# Altium PCB RGB LED.PcbDoc
Units mm, origin at the board's own origin, x right, y up, seen from the top; angles counter-clockwise.
Board outline 125.1 x 71.1 mm, 2 copper layers (Top Layer, Bottom Layer), stack 1.671 mm thick; 57 components, 88 nets, 235 pads, 104 vias.
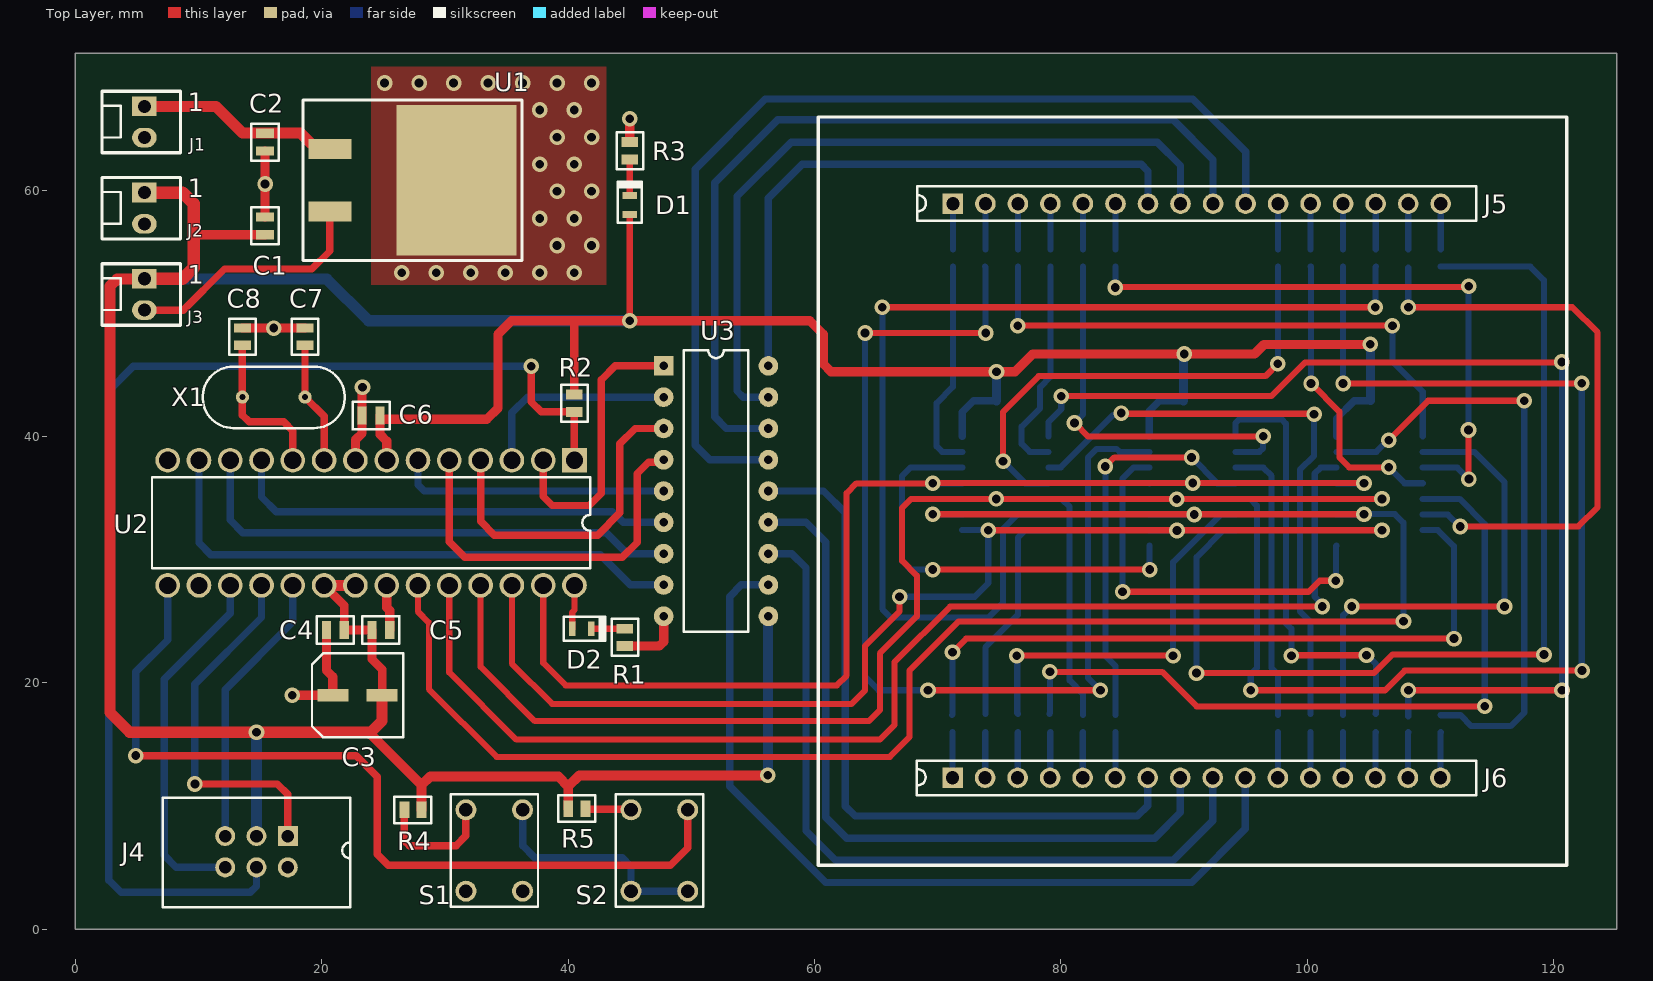
[diagram p0: Top Layer view]
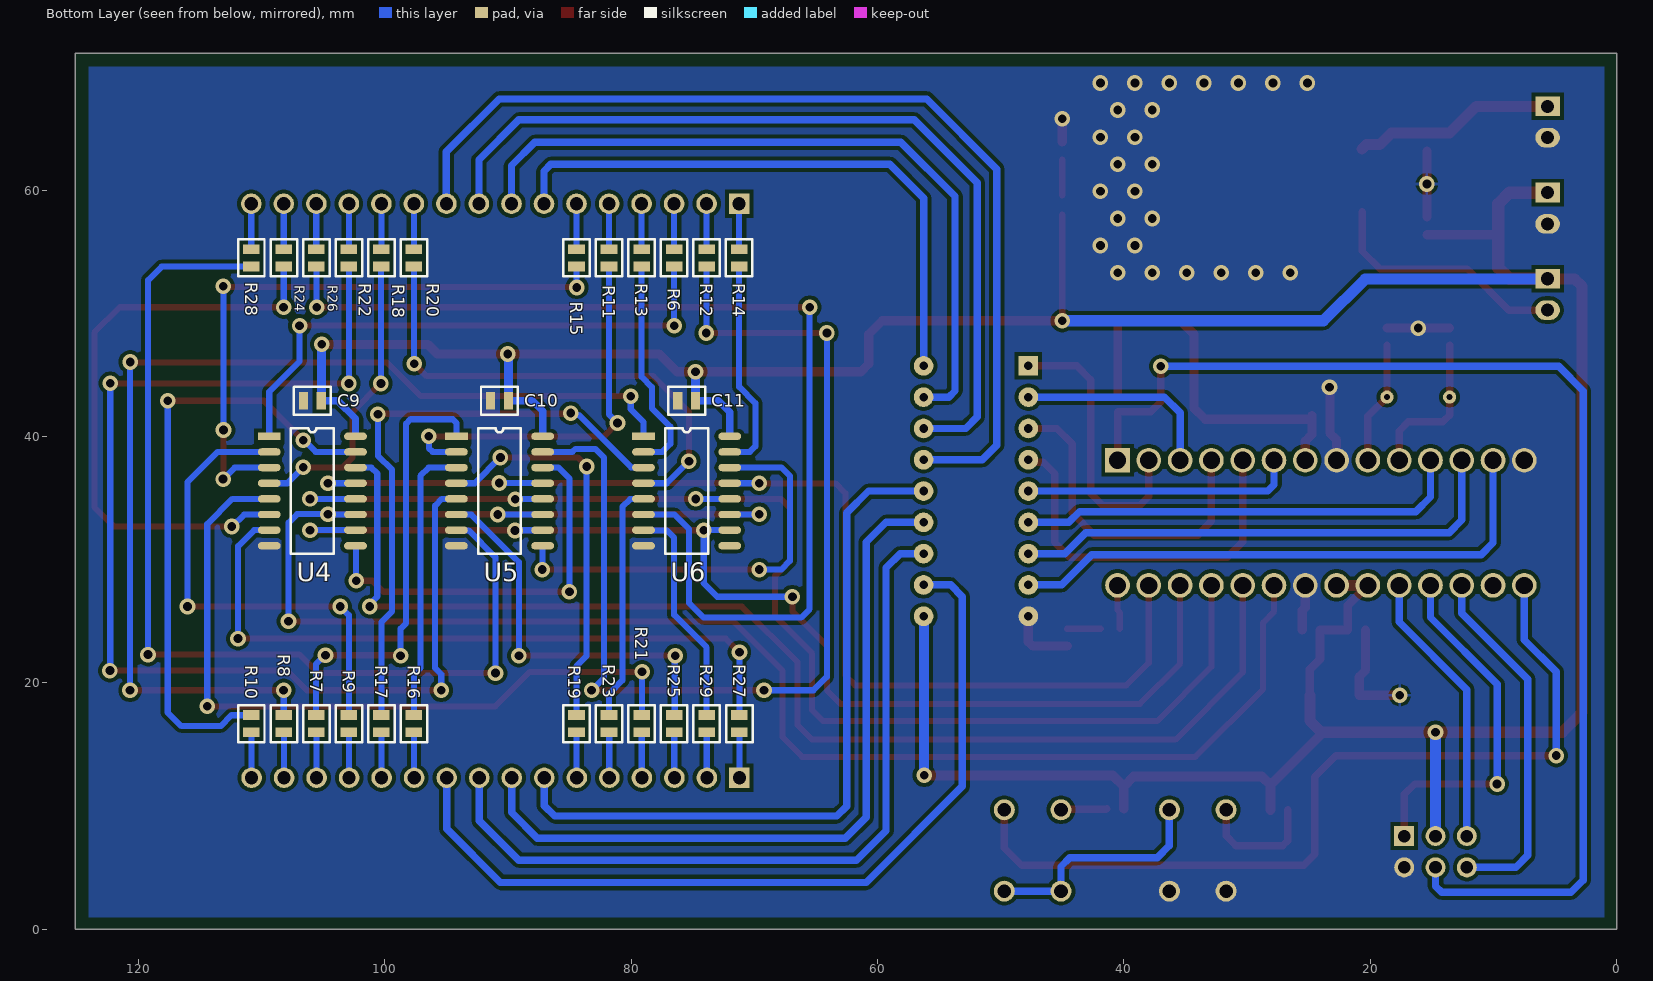
[diagram p1: Bottom Layer view, seen from below]

## Layer stack, top to bottom
Top Solder: solder mask 0.0102, Solder Resist, Dk 3.5
Top Layer: signal copper 0.0356
Dielectric 1: dielectric 1.6, FR-4, Dk 4.8
Bottom Layer: signal copper 0.0356
Bottom Solder: solder mask 0.0102, Solder Resist, Dk 3.5

## Board outline
125.1,71.1 125.1,0 0,0 0,48.6 0,71.1

## Design rules (kind name [scope] priority, off if disabled: settings)
Clearance [All] p1: gap=0.3 ignorepadtopadclearanceinfootprint=FALSE
PolygonConnect [All] p1: connectstyle=Relief reliefconductorwidth=0.254 reliefentries=4 polygonreliefangle="90 Angle" airgapwidth=0.254
RoutingVias [All] p1: holewidth=0.3 width=0.6 viastyle="Through Hole" minholewidth=0.3 minwidth=0.6 maxholewidth=0.3 maxwidth=0.6
SolderMaskExpansion [All] p1: expansion=0.102 istentingtop=FALSE
SupplyNets "Schematic Supply Nets_2" [InNet('GND')] p1: voltage=0.000
SupplyNets "Schematic Supply Nets_1" [InNet('+5V')] p2: voltage=0.000
SupplyNets "Schematic Supply Nets" [InNet('Vcc')] p3: voltage=0.000
Width [All] p1: maxlimit=1 minlimit=0.3 preferedwidth=0.5
30 further rules are at their usual default settings.

## Components (designator, comment, footprint, x,y, rotation, side; value= is the part's Value field where it differs from the comment)
C1 "10uF" "CAP 10UF 0805" 15.4,57.1 r90 top
C2 "10uF" "CAP 10UF 0805" 15.4,63.9 r270 top
C3 "47uF" "CAP 47UF RADIAL CAN" 22.9,19 r180 top
C4 "10uF" "CAP 10UF 0805" 21.1,24.3 r180 top
C5 "0.1uF" "CAP 0.1UF 0805" 24.8,24.3 r0 top
C6 "0.1uF" "CAP 0.1UF 0805" 24,41.7 r180 top
C7 "22pF" "CAP 22PF 0805" 18.64,48.1 r90 top
C8 "22pF" "CAP 22PF 0805" 13.56,48.1 r90 top
C9 "0.1uF" "CAP 0.1UF 0805" 105.863,42.9 r0 bottom
C10 "0.1uF" "CAP 0.1UF 0805" 90.675,42.9 r0 bottom
C11 "0.1uF" "CAP 0.1UF 0805" 75.487,42.9 r0 bottom
D1 "LED 0805 Green" "LED 0805 GREEN" 45,58.8 r90 top
D2 "LED 0805 Green" "LED 0805 GREEN" 41.1,24.4 r0 top
J1 "Generic Header, 1X2 Vertical" 22232021 5.6,65.53 r0 top
J2 "Generic Header, 1X2 Vertical" 22232021 5.6,58.53 r0 top
J3 "Generic Header, 1X2 Vertical" 22232021 5.6,51.53 r0 top
J4 "6-Pin ISP header" "2X3 ISP HEADER" 14.7,6.3 r270 top
J5 "16pin felmale header" "16 PINS FEMALE HEADER" 91.023,58.897 r90 top locked
J6 "16pin felmale header" ? 91,12.3 r90 top
R1 "200R" "RES 200R 0805" 44.6,23.7 r90 top
R2 "10K" "RES 10K 0805" 40.5,42.7 r270 top
R3 "200R" "RES 200R 0805" 45,63.2 r270 top
R4 "10K" "RES 10K 0805" 27.4,9.7 r0 top
R5 "10K" "RES 10K 0805" 40.7,9.8 r0 top
R6 "Resistor 0805 100R" "RES 100R 0805" 76.503,54.5 r270 bottom
R7 "Resistor 0805 100R" "RES 100R 0805" 105.543,16.7 r90 bottom
R8 "Resistor 0805 100R" "RES 100R 0805" 108.183,16.7 r90 bottom
R9 "Resistor 0805 100R" "RES 100R 0805" 102.903,16.7 r90 bottom
R10 "Resistor 0805 100R" "RES 100R 0805" 110.823,16.7 r270 bottom
R11 "Resistor 0805 100R" "RES 100R 0805" 81.783,54.5 r270 bottom
R12 "Resistor 0805 100R" "RES 100R 0805" 73.863,54.5 r90 bottom
R13 "Resistor 0805 100R" "RES 100R 0805" 79.143,54.5 r270 bottom
R14 "Resistor 0805 100R" "RES 100R 0805" 71.223,54.5 r90 bottom
R15 "Resistor 0805 100R" "RES 100R 0805" 84.423,54.5 r270 bottom
R16 "Resistor 0805 100R" "RES 100R 0805" 97.623,16.7 r90 bottom
R17 "Resistor 0805 100R" "RES 100R 0805" 100.263,16.7 r90 bottom
R18 "Resistor 0805 100R" "RES 100R 0805" 100.263,54.5 r270 bottom
R19 "Resistor 0805 100R" "RES 100R 0805" 84.423,16.7 r90 bottom
R20 "Resistor 0805 100R" "RES 100R 0805" 97.623,54.5 r270 bottom
R21 "Resistor 0805 100R" "RES 100R 0805" 79.143,16.7 r90 bottom
R22 "Resistor 0805 100R" "RES 100R 0805" 102.903,54.5 r270 bottom
R23 "Resistor 0805 100R" "RES 100R 0805" 81.783,16.7 r90 bottom
R24 "Resistor 0805 100R" "RES 100R 0805" 108.183,54.5 r270 bottom
R25 "Resistor 0805 100R" "RES 100R 0805" 76.503,16.7 r90 bottom
R26 "Resistor 0805 100R" "RES 100R 0805" 105.543,54.5 r270 bottom
R27 "Resistor 0805 100R" "RES 100R 0805" 71.2,16.7 r90 bottom
R28 "Resistor 0805 100R" "RES 100R 0805" 110.823,54.5 r270 bottom
R29 "Resistor 0805 100R" "RES 100R 0805" 73.863,16.7 r90 bottom
S1 "Tactile Switch" "TACTILE SWITCH" 34,6.4 r90 top
S2 "Tactile Switch" "TACTILE SWITCH" 47.4,6.4 r90 top
U1 "L7805CV" L7805VC 25.8,60.8 r270 top
U2 "ATmega328P" ATMEGA328P 24,33 r270 top
U3 "ULN2803A" ULN2803A 52,35.575 r0 top
U4 "SN74HC595N" SN74HC595N-SOP 105.863,35.575 r180 bottom
U5 "SN74HC595N" SN74HC595N-SOP 90.675,35.575 r180 bottom
U6 "SN74HC595N" SN74HC595N-SOP 75.487,35.575 r180 bottom
X1 "Crystal 16MHz" "CRYSTAL 16MHZ" 16.1,43.2 r180 top

## Footprints (in the part's own frame and the unit in brackets; to place one, negate y for a bottom-side part, rotate by r counter-clockwise, add the part's x,y. Pads: shape width x height; smd on the part's side, far side on the other; paste and mask are expansions set on the pad)
"2X3 ISP HEADER" [mm]
  rect 1.62x1.62 hole 1.02: 1(-1.27,2.54)
  round 1.62 hole 1.02: 2(-1.27,0) 3(-1.27,-2.54) 4(1.27,-2.54) 5(1.27,0) 6(1.27,2.54)
  silkscreen extent -4.4,-7.61 4.51,7.61
"16 PINS FEMALE HEADER" [mm]
  rect 1.67x1.67 hole 1.07: 1(0,19.8)
  round 1.67 hole 1.07: 2(0,17.16) 3(0,14.52) 4(0,11.88) 5(0,9.24) 6(0,6.6) 7(0,3.96) 8(0,1.32) 9(0,-1.32) 10(0,-3.96) 11(0,-6.6) 12(0,-9.24) 13(0,-11.88) 14(0,-14.52) 15(0,-17.16) 16(0,-19.8)
  silkscreen extent -1.4,-22.69 1.4,22.69
22232021 [mm]
  rect 2x1.6 hole 1.07 mask+0.102: 1(0,1.27)
  oval 2x1.6 hole 1.07 mask+0.102: 2(0,-1.27)
  silkscreen extent -3.43,-2.5 2.93,2.5
ATMEGA328P [mm]
  rect 2x2 hole 1.397: 1(-5.08,16.51)
  round 2 hole 1.397: 2(-5.08,13.97) 3(-5.08,11.43) 4(-5.08,8.89) 5(-5.08,6.35) 6(-5.08,3.81) 7(-5.08,1.27) 8(-5.08,-1.27) 9(-5.08,-3.81) 10(-5.08,-6.35) 11(-5.08,-8.89) 12(-5.08,-11.43) 13(-5.08,-13.97) 14(-5.08,-16.51) 15(5.08,-16.51) 16(5.08,-13.97) 17(5.08,-11.43) 18(5.08,-8.89) 19(5.08,-6.35) 20(5.08,-3.81) 21(5.08,-1.27) 22(5.08,1.27) 23(5.08,3.81) 24(5.08,6.35) 25(5.08,8.89) 26(5.08,11.43) 27(5.08,13.97) 28(5.08,16.51)
  silkscreen extent -3.68,-17.78 3.68,17.78
"CAP 0.1UF 0805" [mm]
  rect 0.75x1.45 smd: 1(-0.725,0) 2(0.725,0)
  silkscreen extent -1.5,-1.12 1.5,1.13
"CAP 10UF 0805" [mm]
  rect 0.75x1.45 smd: 1(-0.725,0) 2(0.725,0)
  silkscreen extent -1.5,-1.12 1.5,1.13
"CAP 22PF 0805" [mm]
  rect 0.75x1.35 smd: 1(-0.7,0) 2(0.7,0)
  silkscreen extent -1.48,-1.07 1.48,1.07
"CAP 47UF RADIAL CAN" [mm]
  rect 2.5x1 smd: 1(-2,0) 2(2,0)
  silkscreen extent -3.7,-3.4 3.69,3.4
"CRYSTAL 16MHZ" [mm]
  round 1.075 hole 0.475: 1(-2.54,0) 2(2.54,0)
  silkscreen extent -5.77,-2.48 5.77,2.52
L7805VC [mm]
  rect 1.6x3.5 smd: 1(-2.54,-5.138) 3(2.54,-5.138)
  rect 12.2x9.75 smd: 2(0,5.138)
  silkscreen extent -6.53,-7.31 6.53,10.44
"LED 0805 GREEN" [mm]
  rect 0.55x1.15 smd: 1(0.775,0) 2(-0.775,0)
  silkscreen extent -1.45,-0.97 1.91,0.98
"RES 10K 0805" [mm]
  rect 0.8x1.35 smd: 1(-0.7,0) 2(0.7,0)
  silkscreen extent -1.5,-1.07 1.5,1.07
"RES 100R 0805" [mm]
  rect 0.8x1.35 smd: 1(-0.7,0) 2(0.7,0)
  silkscreen extent -1.5,-1.07 1.5,1.07
"RES 200R 0805" [mm]
  rect 0.8x1.35 smd: 1(-0.7,0) 2(0.7,0)
  silkscreen extent -1.5,-1.07 1.5,1.07
SN74HC595N-SOP [mm]
  rect 1.85x0.6 smd: 1(-3.5,4.445)
  oval 1.85x0.6 smd: 2(-3.5,3.175) 3(-3.5,1.905) 4(-3.5,0.635) 5(-3.5,-0.635) 6(-3.5,-1.905) 7(-3.5,-3.175) 8(-3.5,-4.445) 9(3.5,-4.445) 10(3.5,-3.175) 11(3.5,-1.905) 12(3.5,-0.635) 13(3.5,0.635) 14(3.5,1.905) 15(3.5,3.175) 16(3.5,4.445)
  silkscreen extent -1.74,-5.08 1.74,5.08
"TACTILE SWITCH" [mm]
  round 1.7 hole 1.1: 1(-3.3,2.3) 2(-3.3,-2.3) 3(3.3,-2.3) 4(3.3,2.3)
  silkscreen extent -4.55,-3.55 4.55,3.55
ULN2803A [mm]
  rect 1.6x1.6 hole 0.7: 1(-4.25,10.16)
  round 1.6 hole 0.7: 2(-4.25,7.62) 3(-4.25,5.08) 4(-4.25,2.54) 5(-4.25,0) 6(-4.25,-2.54) 7(-4.25,-5.08) 8(-4.25,-7.62) 9(-4.25,-10.16) 10(4.25,-10.16) 11(4.25,-7.62) 12(4.25,-5.08) 13(4.25,-2.54) 14(4.25,0) 15(4.25,2.54) 16(4.25,5.08) 17(4.25,7.62) 18(4.25,10.16)
  silkscreen extent -2.62,-11.43 2.62,11.43
? [mm]
  rect 1.67x1.67 hole 1.07: 17(0,19.8)
  round 1.67 hole 1.07: 18(0,17.16) 19(0,14.52) 20(0,11.88) 21(0,9.24) 22(0,6.6) 23(0,3.96) 24(0,1.32) 25(0,-1.32) 26(0,-3.96) 27(0,-6.6) 28(0,-9.24) 29(0,-11.88) 30(0,-14.52) 31(0,-17.16) 32(0,-19.8)
  silkscreen extent -1.4,-22.69 1.4,22.69

## Part data
C1 C2 C4: library part "10uF 0805", Package=0805, Capacitance=10uF
C3: library part "47uF Radial, Can -SMD", Manufacturer="Panasonic Electronic Components", Manufacturer Product Number=EEE-FK1V470P, Package="Radial, Can - SMD", Tolerance=±20%, Capacitance=47uF, Impedance="360 mOhms", Series=FK, Vtg rated=35V
C5 C6 C9 C10 C11: library part "0.1uF 0805", Package=0805, Capacitance=0.1uF
C7 C8: library part "22pF 0805", Package=0805, Capacitance=22pF
D1 D2: Colour=Green, Forward Voltage Vf=2.1V, Manufacturer="Lite-On Inc", Part No=LTST-C171GKT, Test Current=20mA, Pacakage=0805
J1 J2 J3: library part "2 pin male header", Current max per contact=4A, Manufacturer=Molex, Part No=22232021, Voltage max=500V, Component Type="PCB Header", Pitch=2.54mm, Product Category="PCB Headers and Receptacles", Product Name=KK254, Series No=6373
J5 J6: Manufacturer="4ucon technology inc", Product ID="Adafruit 598"
R1 R3: library part "Resistor 0805 200R", Manufacturer="KOA Speer Electronics Inc", Package=0805, Part No=RK73B2A, Power=1/4W, Resistance=200R, Tolarance=±5%
R2 R4 R5: library part "Resistor 0805 10K", Manufacturer="KOA Speer Electronics Inc", Package=0805, Part No=RK73B2A, Power=1/4W, Resistance=10K, Tolarance=±5%
R6 R7 R8 R9 R10 R11 R12 R13 R14 R15 R16 R17 R18 R19 R20 R21 R22 R23 R24 R25 R26 R27 R28 R29: Manufacturer="KOA Speer Electronics Inc", Package=0805, Part No=RK73B2A, Power=1/4W, Resistance=100R, Tolarance=±5%
U1: Current - Output=1.5A, Manufacturer=STMicroelectronics, Package=D2PAK, Mounting Type=SMD, Part No=L7805CV, Vtg input (max)=35V, Vtg output (min/fixed)=5V
U2: Manufacturer="Microchip Technology", Package=28-DIP, Core Processor=AVR, Core Size=8-bit, Number of I/O pins=23, Number of pins=28, Series="AVR ATmega"
U3: "8-Darlington Arrays", Manufacturer=STMicroelectronics, Package=18-DIP, Mounting Type="Through Hole", Part No=ULN2803A
U4 U5 U6: "Shift Register", Manufacturer="Texas Instrument", Package=16-DIP, Function="Serial to Parallel, Serial", Logic Type="Shift Register", Mounting Type="Through Hole", Output type=Tri-state, Part No=SN74HC595N, Series=74HC, Vtg Supply="2V ~ 6V"
X1: Frequency=16MHz, Manufacturer="Abracon LLC", Package=HC-49/US, Part No=ABL-16.000MHZ-B2
J4: No of Pins=6, No of rows=2
S1 S2: Plunger Type=Flat, Type="Standard B3F 1000 series"

## Via types
v1: diameter 1.27, hole 0.711, Top Layer to Bottom Layer, 104 vias

## Nets (pads, with @x,y where several pads share a name; then routed paths per layer and width w, separated by ;. In a path a pad name is that pad's centre, name@x,y a point inside that pad or via, vN(x,y) a via of type N, cw(c..) or ccw(c..) an arc to the next point about the centre after c; other vN are vias at no path point)
+5V: C1.1 C3.1 C4.1 C5.1 C6.1 C9.1 C10.1 C11.1 D1.2 J2.1 J3.1 J4.2 R2.1 R4.2 R5.1 U2.7 U2.20 U2.21 U3.10 U4.16 U5.16 U6.16 | length 334.4
  Top Layer w0.5: v1(45,49.4) D1.2 ; v1@105.073,47.473 v1(105.1,47.5)
  Top Layer w0.6: 24,15.8 24,16
  Top Layer w0.7: U2.20 21.825,26.285 C4.1 C5.1 24.075,21.925 24.9,21.1 C3.1 ; R2.1 40.5,49.4
  Top Layer w0.75: 9.6,56.3 9.675,56.375 C1.1 ; C6.1 24.725,40.175 25.27,39.63 U2.7 ; 28.1,41.4 33.4,41.4 34.3,42.3 34.3,48.3 35.4,49.4 40.5,49.4 v1(45,49.4) 59.6,49.4 60.7,48.3 60.7,45.9 61.338,45.262 v1(74.762,45.262) 76.262,45.262 77.7,46.7 v1(90,46.7) 95.7,46.7 96.473,47.473 v1@105.073,47.473
  Top Layer w0.758: C6.1 24.729,41.696 24.729,41.4 28.1,41.4
  Top Layer w0.8: 24,15.8 28.1,11.7 ; R4.2 28.1,11.7 ; R5.1 40,11.6 ; v1(56.2,12.5) 40.9,12.5 40,11.6 ; 28.1,11.7 28.8,12.4 39.2,12.4 40,11.6
  Top Layer w0.9: J3.1 3.4,52.8 2.8,52.2 2.8,17.6 4.4,16 v1(14.7,16) 24,16 24.9,16.9 C3.1 ; U2.20 U2.21
  Top Layer w1: J3.1 8.7,52.8 9.6,53.7 9.6,56.3 9.6,58.9 8.7,59.8 J2.1
  Bottom Layer w0.5: v1@89.95,46.65 v1(90,46.7) ; v1(105.1,47.5) v1@105.119,47.481 ; C9.1@105.119,42.919 C9.1
  Bottom Layer w0.6: v1(56.2,12.5) v1@56.225,12.525 ; U3.10@56.225,25.39 U3.10 ; U6.16 71.987,41.987 72.9,42.9 C11.1 ; U5.16 87.175,42.075 88,42.9 C10.1 ; U4.16 102.363,41.463 103.8,42.9 C9.1
  Bottom Layer w0.75: C11.1 v1(74.762,45.262) ; C10.1 v1@89.95,46.65 ; C9.1@105.119,42.919 v1@105.119,47.481
  Bottom Layer w0.8: v1@56.225,12.525 U3.10@56.225,25.39
  Bottom Layer w0.9: J3.1 20.4,52.8 23.8,49.4 v1(45,49.4) ; J4.2 v1(14.7,16)
B1: J5.1 R14.2 | length 3.7
  Bottom Layer w0.5: R14.2 J5.1@71.223,58.897
B2: J6.31 R8.1 | length 3.7
  Bottom Layer w0.5: J6.31 108.172,12.312 108.172,15.988 R8.1
B3: J5.4 R13.1 | length 3.7
  Bottom Layer w0.5: R13.1 J5.4
B4: J6.28 R17.1 | length 3.7
  Bottom Layer w0.5: J6.28 100.252,12.312 100.252,15.988 R17.1
B5: J5.11 R20.1 | length 3.7
  Bottom Layer w0.5: R20.1 J5.11
B6: J6.21 R23.1 | length 3.7
  Bottom Layer w0.5: J6.21 81.772,12.311 81.772,15.988 R23.1
B7: J5.14 R26.1 | length 3.7
  Bottom Layer w0.5: R26.1 J5.14
B8: J6.18 R29.1 | length 3.7
  Bottom Layer w0.5: J6.18 73.852,12.311 73.852,15.988 R29.1
G1: J5.2 R12.2 | length 3.7
  Bottom Layer w0.5: R12.2 J5.2
G2: J6.30 R7.1 | length 3.7
  Bottom Layer w0.5: J6.30 105.532,12.312 105.532,15.988 R7.1
G3: J5.5 R11.1 | length 3.7
  Bottom Layer w0.5: R11.1 J5.5
G4: J6.27 R16.1 | length 3.7
  Bottom Layer w0.5: J6.27 97.611,12.311 97.611,15.988 R16.1
G5: J6.22 R19.1 | length 3.7
  Bottom Layer w0.5: J6.22 84.411,12.311 84.411,15.988 R19.1
G6: J5.13 R22.1 | length 3.7
  Bottom Layer w0.5: R22.1 J5.13
G7: J6.19 R25.1 | length 3.7
  Bottom Layer w0.5: J6.19 76.492,12.311 76.492,15.988 R25.1
G8: J5.16 R28.1 | length 3.7
  Bottom Layer w0.5: R28.1 J5.16
GND: C1.2 C2.2 C3.2 C4.2 C5.2 C6.2 C7.2 C8.2 C9.2 C10.2 C11.2 J1.2 J2.2 J4.6 R1.1 R3.1 S1.1 S1.2 U1.2 U2.8 U2.14 U2.22 U3.9 U4.8 U5.8 U6.8 | length 36.4
  Top Layer w0.75: C8.2 v1(16.1,48.8) C7.2 ; C1.2 C2.2 ; v1(17.6,19) C3.2 20.9,20.5 20.375,21.025 C4.2 ; U2.8 22.73,39.73 23.275,40.275 C6.2 23.275,43.975 v1(23.3,44) ; U2.22 25.27,26.13 25.525,25.875 C5.2 ; R1.1 47.4,23 47.75,23.35 U3.9 ; R3.1 v1(45,65.8)
  other v1: 26.5,53.3 29.3,53.3 32.1,53.3 34.9,53.3 37.7,53.3 40.5,53.3 39.1,55.5 41.9,55.5 37.7,57.7 40.5,57.7 39.1,59.9 41.9,59.9 15.4,60.5 37.7,62.1 40.5,62.1 39.1,64.3 41.9,64.3 37.7,66.5 40.5,66.5 25.1,68.7 27.9,68.7 30.7,68.7 33.5,68.7 36.3,68.7 39.1,68.7 41.9,68.7
NetC7_1: C7.1 U2.9 X1.1 | length 10
  Top Layer w0.6: C7.1 X1.1 20.19,41.65 U2.9
NetC8_1: C8.1 U2.10 X1.2 | length 12.7
  Top Layer w0.6: C8.1 X1.2 13.56,41.74 14.1,41.2 16.9,41.2 17.65,40.45 U2.10
NetD1_1: D1.1 R3.2 | length 2.9
  Top Layer w0.5: D1.1 R3.2
NetD2_1: D2.1 R1.2 | length 2.8
  Top Layer w0.5: D2.1@41.888,24.388 D2.1 R1.2 R1.2@44.588,24.388
NetD2_2: D2.2 U2.28 | length 3.6
  Top Layer w0.5: D2.2 40.325,25.725 40.51,25.91 U2.28
NetJ3_2: J3.2 U1.3 | length 20.2
  Top Layer w0.6: J3.2 8.76,50.26 12.1,53.6 19.2,53.6 20.662,55.062 U1.3
NetJ4_1: J4.1 U2.18 | length 29.6
  Top Layer w0.6: v1(9.7,11.8) 16.4,11.8 17.24,10.96 J4.1
  Bottom Layer w0.6: v1(9.7,11.8) 9.7,19.9 15.11,25.31 U2.18
NetJ4_3: J4.3 U2.19 | length 22.6
  Bottom Layer w0.6: J4.3 12.16,19.46 17.65,24.95 U2.19
NetJ4_4: J4.4 U2.17 | length 29.5
  Bottom Layer w0.6: J4.4 8.17,5.03 7.2,6 7.2,20.3 12.57,25.67 U2.17
NetR4_1: R4.1 S1.4 | length 10.1
  Top Layer w0.6: R4.1 26.7,7.2 27.1,6.8 30.9,6.8 31.7,7.6 S1.4
NetR5_2: R5.2 S2.4 | length 3.7
  Top Layer w0.6: R5.2 41.45,9.75 45.05,9.75 S2.4
NetR6_2: R6.2 U4.1 | length 45.2
  Top Layer w0.5: v1(76.5,49) v1(106.9,49)
  Bottom Layer w0.5: v1(76.5,49) 76.502,49.001 R6.2 ; v1(106.9,49) 106.9,46.1 109.363,43.637 U4.1
NetR7_2: R7.2 U5.1 | length 35.7
  Top Layer w0.5: v1(98.7,22.2) 98.75,22.25 104.75,22.25 v1@104.8,22.3
  Bottom Layer w0.5: U5.1 94.175,41.107 94.468,41.4 97.907,41.4 98.261,41.046 98.261,24.839 98.7,24.4 v1(98.7,22.2) ; v1@104.8,22.3 105.572,21.529 105.572,17.55 105.543,17.522 R7.2@105.543,17.5
  other v1: 104.8,22.25
NetR8_2: R8.2 U6.1 | length 86.6
  Top Layer w0.5: v1(80.026,43.261) 80.065,43.3 97.1,43.3 99.8,46 120.602,46 v1(120.653,46.051) ; v1(108.2,19.4) v1(120.663,19.4)
  Bottom Layer w0.5: U6.1 78.987,41.187 80.026,42.226 v1(80.026,43.261) ; R8.2@108.183,17.3 108.192,17.308 108.192,19.392 v1(108.2,19.4) ; v1(120.653,46.051) 120.658,46.046 120.658,19.488 v1@120.663,19.483
NetR9_2: R9.2 U4.2 | length 39.2
  Top Layer w0.5: v1(103.6,26.2) v1(116,26.2)
  Bottom Layer w0.5: R9.2 102.903,17.549 102.902,17.55 102.902,25.502 v1(103.6,26.2) ; U4.2 113.55,38.75 116,36.3 v1(116,26.2)
NetR10_1: R10.1 U4.15 | length 49.9
  Top Layer w0.5: v1(106.6,39.7) 109.8,42.9 v1(117.6,42.9)
  Bottom Layer w0.5: U4.15 105.591,38.75 106.541,39.7 v1(106.6,39.7) ; R10.1 110.852,17.371 112.429,17.371 113.3,16.5 116.5,16.5 117.6,17.6 v1(117.6,42.9)
NetR11_2: R11.2 U5.2 | length 32.1
  Top Layer w0.5: v1(81.1,41.1) 82.2,40 96.4,40 v1(96.414,40.014)
  Bottom Layer w0.5: v1(81.1,41.1) 81.8,41.8 R11.2@81.8,53.783 ; U5.2 96.106,38.75 96.398,39.043 96.398,39.998 v1(96.414,40.014)
NetR12_1: R12.1 U5.15 | length 87.4
  Top Layer w0.5: v1(64.1,48.4) v1(73.9,48.4) ; v1(69.2,19.4) v1(83.2,19.4)
  Bottom Layer w0.5: v1(64.1,48.4) 64.1,20.5 65.2,19.4 v1(69.2,19.4) ; R12.1@73.832,53.8 73.882,53.75 73.882,48.418 v1(73.9,48.4) ; v1(83.2,19.4) 82.2,20.4 82.2,38.3 82.9,39 84.5,39 84.75,38.75 U5.15
NetR13_2: R13.2 U6.2 | length 17.8
  Bottom Layer w0.5: U6.2 77.45,38.75 76.8,39.4 76.8,40.8 78.3,42.3 78.3,44 79.143,44.843 R13.2
NetR14_1: R14.1 U6.15 | length 17.4
  Bottom Layer w0.5: R14.1 71.223,44.023 69.9,42.7 69.9,39.2 70.35,38.75 U6.15
NetR15_2: R15.2 U4.3 | length 50.3
  Top Layer w0.5: v1(84.4,52.1) 84.45,52.15 113.05,52.15 v1(113.1,52.2) ; v1(113.075,40.525) 113.075,36.575 v1(113.107,36.543)
  Bottom Layer w0.5: v1(84.4,52.1) 84.411,52.111 84.411,53.788 R15.2 ; U4.3 112.17,37.48 v1(113.107,36.543) ; v1(113.075,40.525) 113.088,40.538 113.088,52.187 v1(113.1,52.2)
NetR16_2: R16.2 U5.3 | length 22.8
  Bottom Layer w0.5: U5.3 96.42,37.48 97.1,36.8 97.1,21.2 97.623,20.677 R16.2
NetR17_2: R17.2 U6.3 | length 48.6
  Top Layer w0.5: v1(84.9,41.9) 84.949,41.851 100.494,41.851 v1(100.543,41.801)
  Bottom Layer w0.5: U6.3 79.006,37.499 79.999,37.499 84.253,41.753 84.753,41.753 v1(84.9,41.9) ; R17.2@100.263,17.5 100.263,24.937 99.4,25.8 99.4,37.3 100.543,38.443 v1(100.543,41.801)
NetR18_2: R18.2 U4.4 | length 24.2
  Top Layer w0.5: v1(100.3,44.307) 102.6,42.007 102.6,38.3 103.4,37.5 v1(106.6,37.5)
  Bottom Layer w0.5: R18.2 100.282,53.782 100.282,44.218 v1@100.3,44.2 ; v1(106.6,37.5) 107.89,36.21 U4.4
NetR19_2: R19.2 U5.4 | length 32.3
  Top Layer w0.5: v1(83.6,37.565) 84.335,38.3 v1(90.6,38.3)
  Bottom Layer w0.5: v1(83.6,37.565) 83.6,22.2 84.423,21.377 R19.2 ; v1(90.6,38.3) 92.69,36.21 U5.4
NetR20_2: R20.2 U6.4 | length 40.3
  Top Layer w0.5: v1(75.3,38) 75.3,42 78.2,44.9 96.6,44.9 v1(97.6,45.9)
  Bottom Layer w0.5: v1(75.3,38) 77.09,36.21 U6.4 ; v1(97.6,45.9) 97.612,45.912 97.612,53.788 R20.2
NetR21_2: R21.2 U4.5 | length 60.6
  Top Layer w0.5: v1(79.1,20.9) 88.2,20.9 91,18.1 v1(114.4,18.1)
  Bottom Layer w0.5: R21.2@79.072,17.5 79.122,17.55 79.122,20.878 v1(79.1,20.9) ; U4.5 112.36,34.94 114.4,32.9 v1(114.4,18.1)
NetR22_2: R22.2 U5.5 | length 96.9
  Top Layer w0.5: v1(95.4,19.4) 106.3,19.4 107.9,21 122.2,21 v1@122.3,21.1 ; v1(102.9,44.307) 102.91,44.317 122.231,44.317 v1@122.248,44.3
  Bottom Layer w0.5: U5.5 95.36,34.94 95.9,34.4 95.9,21.2 95.4,20.7 v1(95.4,19.4) ; v1(102.9,44.307) 102.901,44.308 102.901,53.793 R22.2@102.899,53.796 ; v1(122.267,44.327) 122.267,21.133 v1@122.3,21.1
  other v1: 122.3,21
NetR23_2: R23.2 U6.5 | length 19.3
  Bottom Layer w0.5: U6.5 79.006,34.921 80.079,34.921 80.7,34.3 80.7,20.2 81.783,19.117 R23.2
NetR24_2: R24.2 U4.6 | length 48.8
  Top Layer w0.5: v1(108.2,50.5) 121.5,50.5 123.55,48.45 123.55,34.25 122,32.7 v1(112.4,32.7)
  Bottom Layer w0.5: R24.2@108.183,53.699 108.192,53.69 108.192,50.509 v1(108.2,50.5) ; U4.6 111.411,33.67 112.381,32.7 v1(112.4,32.7)
NetR25_2: R25.2 U5.6 | length 31.7
  Top Layer w0.5: v1(76.4,22.215) v1(89.1,22.215)
  Bottom Layer w0.5: v1(76.4,22.215) 76.452,22.164 76.452,17.55 R25.2@76.502,17.5 ; v1(89.1,22.215) 89.1,29.8 92.97,33.67 U5.6
NetR26_2: R26.2 U6.6 | length 88.6
  Top Layer w0.5: v1(65.5,50.5) v1(105.5,50.5)
  Bottom Layer w0.5: v1(65.5,50.5) 65.5,26 66.2,25.3 74.1,25.3 75.3,26.5 75.3,32.5 76.47,33.67 U6.6 ; v1(105.5,50.5) 105.522,50.521 105.522,53.75 R26.2@105.572,53.8
NetR27_2: R27.2 U4.7 | length 56.8
  Top Layer w0.5: v1(71.2,22.5) 72.3,23.6 111.8,23.6 v1@111.9,23.7
  Bottom Layer w0.5: R27.2@71.15,17.4 71.2,17.45 v1(71.2,22.5) ; U4.7 110.6,32.4 111.9,31.1 v1@111.9,23.7
  other v1: 111.9,23.6
NetR28_2: R28.2 U5.7 | length 81.5
  Top Layer w0.5: v1(91,20.8) 105.4,20.8 106.9,22.3 v1(119.2,22.3)
  Bottom Layer w0.5: v1(91,20.8) 91,30.2 93.181,32.381 94.156,32.381 U5.7 ; R28.2 118.1,53.8 119.2,52.7 v1(119.2,22.3)
NetR29_2: R29.2 U6.7 | length 18.1
  Bottom Layer w0.5: R29.2@73.863,17.5 73.863,22.882 76.5,25.518 76.5,31.8 77.081,32.381 78.968,32.381 U6.7
NetS1_3: S1.3 S2.1 S2.2 | length 19
  Bottom Layer w0.6: S1.3 36.3,6.8 37.3,5.8 44.4,5.8 45.1,5.1 S2.1 S2.2
NetS2_3: S2.3 U2.15 | length 70.7
  Top Layer w0.6: v1(4.9,14.1) 22.8,14.1 24.5,12.4 24.5,6.1 25.4,5.2 48.3,5.2 49.7,6.6 S2.3
  Bottom Layer w0.6: v1(4.9,14.1) 4.9,20.9 7.49,23.49 U2.15
NetU4_9: U4.9 U5.14 | length 32.3
  Top Layer w0.5: v1(85,27.4) 100.1,27.4 101,28.3 v1(102.3,28.3)
  Bottom Layer w0.5: v1(85,27.4) 85,36.6 85.88,37.48 U5.14 ; v1(102.3,28.3) 102.331,28.331 102.331,31.099 U4.9
NetU5_9: U5.9 U6.14 | length 34.4
  Top Layer w0.5: v1(69.6,29.2) v1(87.2,29.2)
  Bottom Layer w0.5: v1(69.6,29.2) 67.8,29.2 67.1,29.9 67.1,36.8 67.78,37.48 U6.14 ; U5.9 87.187,31.118 87.187,29.213 v1(87.2,29.2)
OE: U2.27 U4.13 U5.13 U6.13 | length 97.5
  Top Layer w0.5: U2.27 37.97,21.63 39.8,19.8 61.8,19.8 62.6,20.6 62.6,35.4 63.394,36.194 69.593,36.194 v1(69.6,36.2) ; v1@69.623,36.223 v1(90.691,36.223) 90.698,36.217 104.803,36.217 v1@104.81,36.21
  Bottom Layer w0.5: v1(69.6,36.2) 69.605,36.205 71.982,36.205 U6.13 ; U5.13 87.182,36.217 90.684,36.217 v1(90.691,36.223) ; U4.13 v1(104.6,36.21)
R1: J6.32 R10.2 | length 3.7
  Bottom Layer w0.5: J6.32 110.812,12.312 110.812,15.988 R10.2
R2: J5.3 R6.1 | length 3.7
  Bottom Layer w0.5: R6.1 J5.3
R3: J6.29 R9.1 | length 3.7
  Bottom Layer w0.5: J6.29 102.892,12.312 102.892,15.988 R9.1
R4: J5.6 R15.1 | length 3.7
  Bottom Layer w0.5: R15.1 J5.6
R5: J5.12 R18.1 | length 3.7
  Bottom Layer w0.5: R18.1 J5.12
R6: J6.20 R21.1 | length 3.7
  Bottom Layer w0.5: J6.20 79.132,12.311 79.132,15.988 R21.1
R7: J5.15 R24.1 | length 3.7
  Bottom Layer w0.5: R24.1 J5.15
R8: J6.17 R27.1 | length 3.7
  Bottom Layer w0.5: J6.17 R27.1
"R_IN 1": U2.13 U3.8 | length 45.8
  Bottom Layer w0.6: U2.13 10.03,31.37 11,30.4 42.6,30.4 45.045,27.955 U3.8
"R_IN 2": U2.12 U3.7 | length 41.2
  Bottom Layer w0.6: U2.12 12.57,33.23 13.6,32.2 43.1,32.2 44.805,30.495 U3.7
"R_IN 3": U2.11 U3.6 | length 36.5
  Bottom Layer w0.6: U2.11 15.11,35.09 16.3,33.9 43.6,33.9 44.465,33.035 U3.6
"R_IN 4": U2.6 U3.5 | length 22.1
  Bottom Layer w0.6: U2.6 27.81,36.09 28.325,35.575 U3.5
"R_IN 5": U2.5 U3.4 | length 31.1
  Top Layer w0.6: U2.5 30.35,31.45 31.6,30.2 44.4,30.2 45.6,31.4 45.6,37 46.524,37.924 47.559,37.924 U3.4
"R_IN 6": U2.4 U3.3 | length 27.2
  Top Layer w0.6: U2.4 32.89,33.11 34,32 42.4,32 44.2,33.8 44.2,39.4 45.455,40.655 U3.3
"R_IN 7": U2.3 U3.2 | length 16.7
  Top Layer w0.6: U3.2@47.745,43.2 U3.2
  Bottom Layer w0.6: U2.3 35.43,41.93 36.695,43.195 U3.2
"R_IN 8": U2.2 U3.1 | length 23.1
  Top Layer w0.6: U2.2 37.97,35.13 38.7,34.4 41.7,34.4 42.7,35.4 42.7,44.6 43.835,45.735 U3.1
RCLK: U2.25 U4.12 U5.12 U6.12 | length 107.4
  Top Layer w0.5: U2.25 32.89,21.31 37.3,16.9 64.4,16.9 65.3,17.8 65.3,22.4 68.3,25.4 68.3,28.7 67.1,29.9 67.1,34.2 67.84,34.94 v1(74.74,34.94) 74.759,34.921 89.376,34.921 v1(89.395,34.901) 89.414,34.921 106.041,34.921 v1(106.06,34.94)
  Bottom Layer w0.5: U6.12@72.006,34.921 U6.12 v1(74.74,34.94) ; U5.12 87.194,34.921 89.376,34.921 v1(89.395,34.901) ; U4.12 v1(106.06,34.94)
RESET: J4.5 R2.2 U2.1 | length 99.6
  Top Layer w0.6: v1(37,45.7) 37,42.8 37.8,42 R2.2 40.5,38.09 U2.1
  Bottom Layer w0.6: J4.5 14.7,3.5 14.2,3 3.7,3 2.7,4 2.7,43.7 4.7,45.7 v1(37,45.7)
"ROW 1": J6.26 U3.11 | length 70
  Bottom Layer w0.6: U3.11 54.055,27.955 53.1,27 53.1,11.6 60.9,3.8 90.6,3.8 94.96,8.16 J6.26
"ROW 2": J6.25 U3.12 | length 63.7
  Bottom Layer w0.6: U3.12 58.149,30.495 59.3,29.344 59.3,8 61.7,5.6 89.1,5.6 92.32,8.82 J6.25
"ROW 3": J6.24 U3.13 | length 60.8
  Bottom Layer w0.6: U3.13 59.307,33.035 60.9,31.442 60.9,9.1 62.6,7.4 87.6,7.4 89.68,9.48 J6.24
"ROW 4": J6.23 U3.14 | length 58.3
  Top Layer w0.5: J6.23 J6.23@87.063,12.277
  Bottom Layer w0.6: U3.14 60.725,35.575 62.5,33.8 62.5,10 63.3,9.2 86.2,9.2 87.04,10.04 J6.23
"ROW 5": J5.10 U3.15 | length 81.9
  Bottom Layer w0.6: U3.15 51.485,38.115 50.3,39.3 50.3,61.7 56,67.4 90.7,67.4 94.983,63.117 J5.10
"ROW 6": J5.9 U3.16 | length 71.2
  Bottom Layer w0.6: U3.16 52.845,40.655 51.9,41.6 51.9,60.6 57,65.7 89.1,65.7 92.343,62.457 J5.9
"ROW 7": J5.8 U3.17 | length 60.3
  Bottom Layer w0.6: U3.17 54.205,43.195 53.7,43.7 53.7,59.5 58.1,63.9 87.8,63.9 89.703,61.997 J5.8
"ROW 8": J5.7 U3.18 | length 48.4
  Bottom Layer w0.6: U3.18 56.25,59.35 59,62.1 86.5,62.1 87.063,61.537 J5.7
SER: U2.24 U4.14 | length 100.6
  Top Layer w0.5: U2.24 30.35,20.85 35.8,15.4 65.3,15.4 66.5,16.6 66.5,21.7 71,26.2 v1(101.2,26.2)
  Bottom Layer w0.5: v1(101.2,26.2) 101.2,26.408 100.6,27.008 100.6,31.854 100.6,37 101.08,37.48 U4.14
SRCLK: U2.23 U4.11 U5.11 U6.11 | length 152.9
  Top Layer w0.5: U2.23 27.81,25.79 28.7,24.9 28.7,19.5 34.2,14 66.1,14 67.7,15.6 67.7,21 71.7,25 v1(107.8,25) ; v1@69.5,33.7 69.515,33.685 90.794,33.685 v1(90.809,33.671) 90.824,33.685 104.585,33.685 v1(104.6,33.7)
  Bottom Layer w0.5: v1@69.5,33.7 69.515,33.685 71.972,33.685 U6.11 ; U5.11 v1@90.808,33.67 ; U4.11 102.378,33.685 104.585,33.685 v1(104.6,33.7) 107.1,33.7 107.8,33 v1(107.8,25)
  other v1: 69.6,33.7
SRCLR: U2.26 U4.10 U5.10 U6.10 | length 97.5
  Top Layer w0.5: U2.26 35.43,21.57 38.7,18.3 63,18.3 64.1,19.4 64.1,23 66.9,25.8 v1(66.9,27) ; v1(74.1,32.4) 74.113,32.387 89.409,32.387 v1(89.421,32.375) 89.434,32.387 105.987,32.387 v1@106,32.4
  Bottom Layer w0.5: v1(66.9,27) 73,27 74.1,28.1 v1(74.1,32.4) U6.10 ; U5.10 87.188,32.387 89.409,32.387 v1(89.421,32.375) ; U4.10 v1(106.06,32.4)
Vcc: C2.1 J1.1 U1.1 | length 16.5
  Top Layer w0.9: J1.1 11.4,66.8 13.575,64.625 18.275,64.625 19.21,63.69 20.312,63.69 U1.1
pads on no net: U2.16 U6.9

## Polygon pours and split planes (outlines as drawn)
GND on Top Layer "GND_L01_P010" (solid, remove dead copper, pour order 10): 24,70 24,52.3 43.1,52.3 43.1,70
GND on Bottom Layer "GND_L02_P009" (solid, remove dead copper, pour order 9): 1,1 124,1 124,70 1,70

## Silkscreen, mask and mechanical layers (free items; w line width, h text height)
Top Overlay:
  lines w0.254: 60.3,5.2 121.05,5.2 121.05,65.95 60.3,65.95 60.3,5.2
Board Outline:
  lines w0.1: 0,0 0,71.1 125.1,71.1 125.1,0 0,0

## Text inside footprints (layer, text, board x,y; h text height)
J1: Top Overlay "1" at 9.124,66.414 h1.52
J2: Top Overlay "1" at 9.124,59.414 h1.52
J3: Top Overlay "1" at 9.124,52.414 h1.52
S1: Mechanical 29 "1" at 32.057,4.325 h0.7 r90
S2: Mechanical 29 "1" at 45.457,4.325 h0.7 r90